# EAGLE board 04B-352-A1-01 (EAGLE 9.6.2)
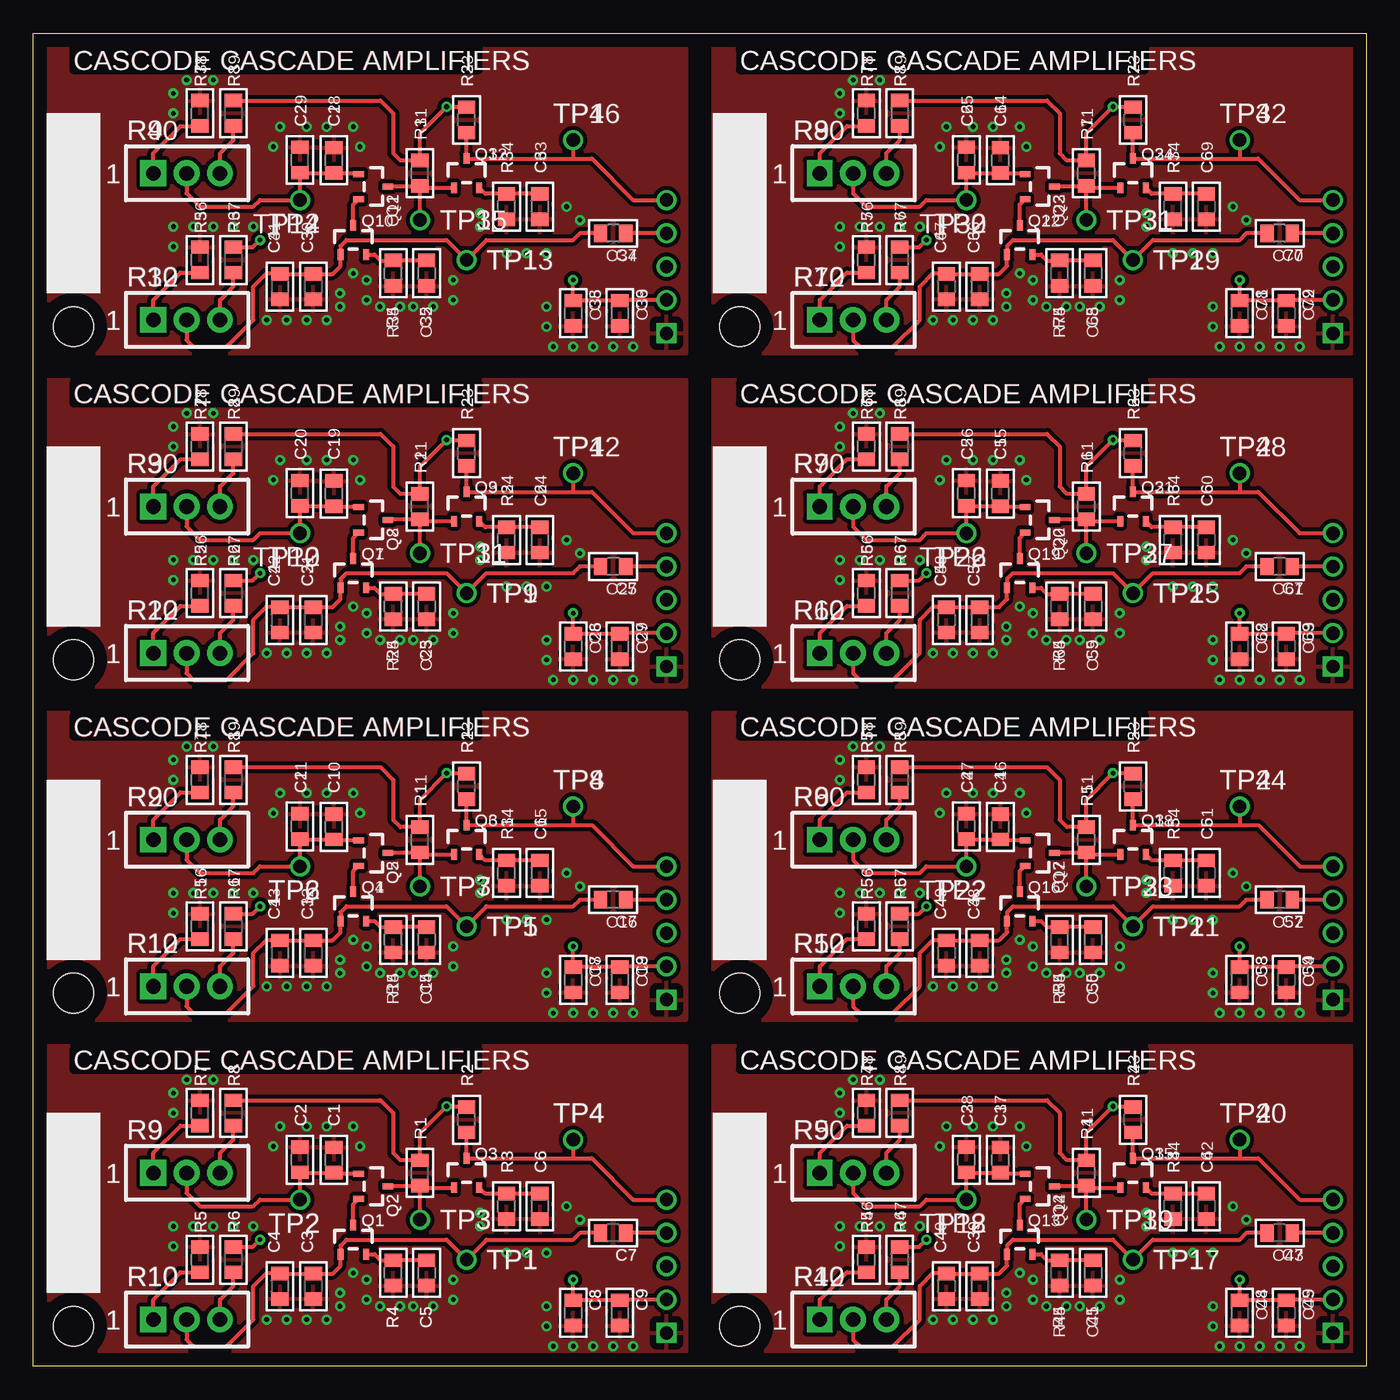
[diagram p0: board, top side]
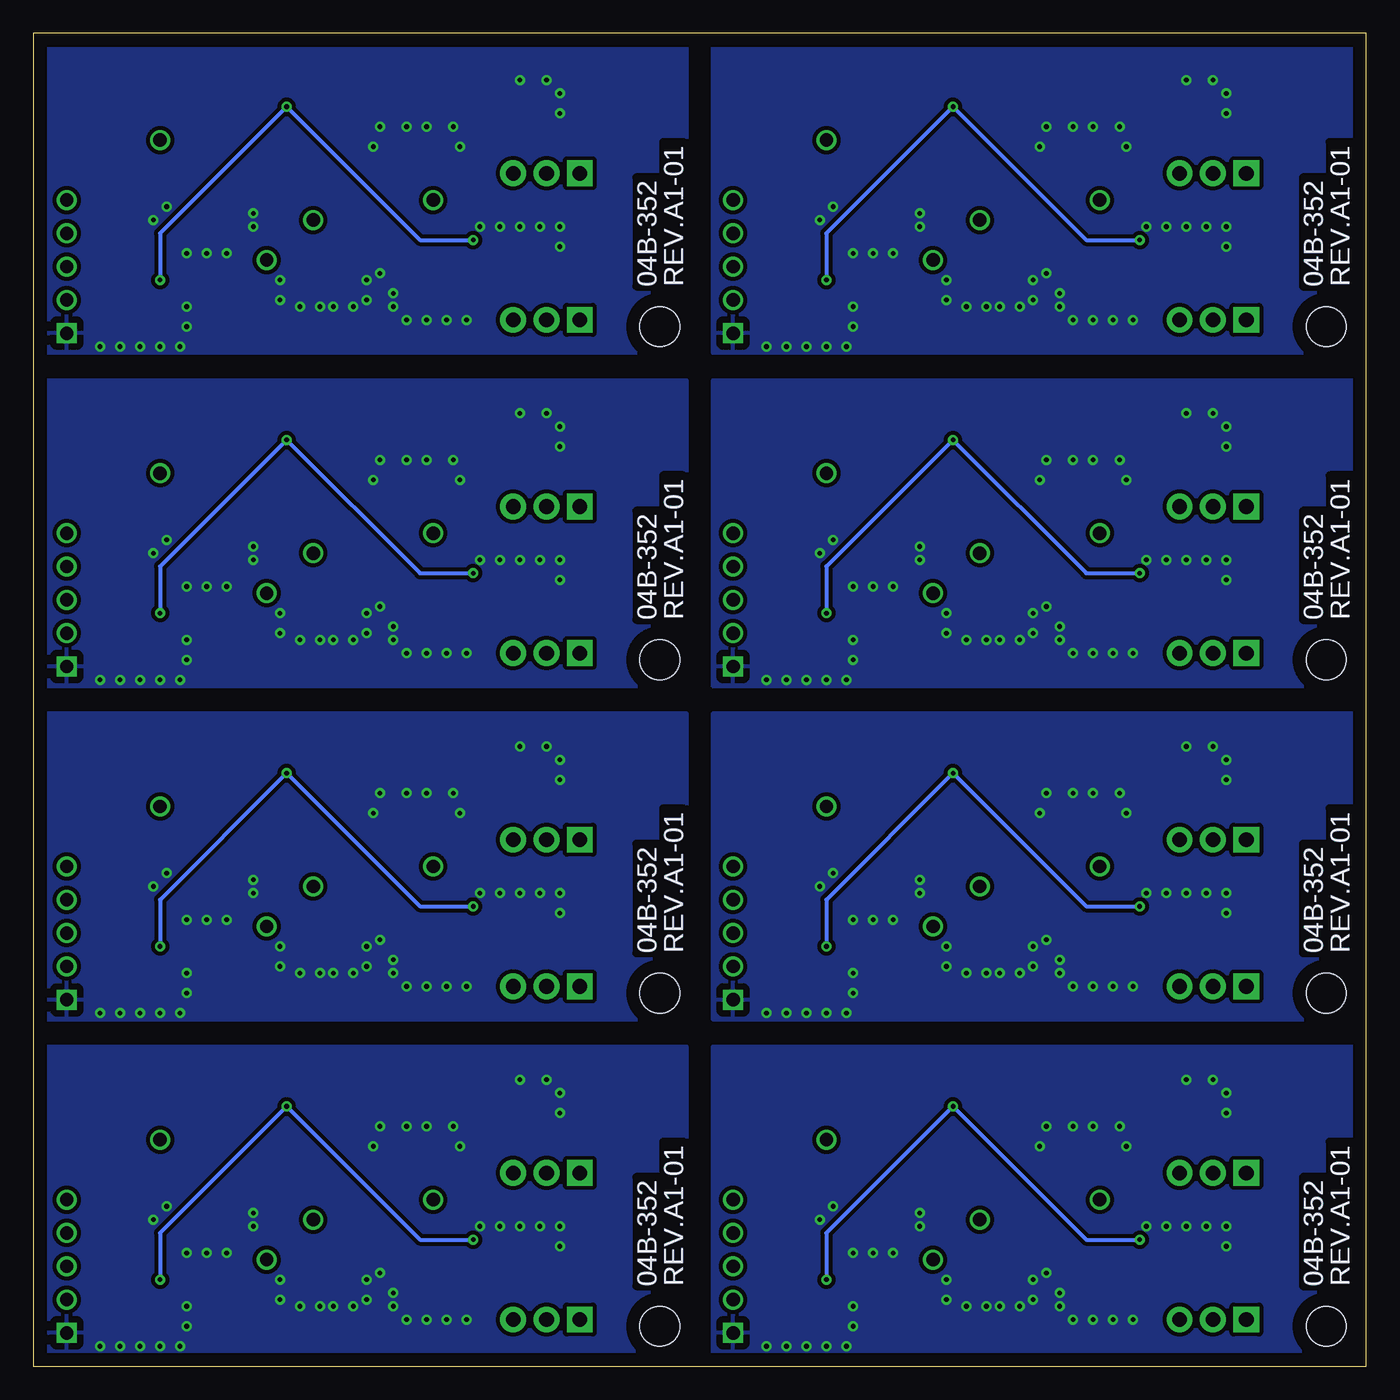
[diagram p1: board, bottom side, seen from below]

Size 100 x 100 mm. Coordinates in mm from the lower left corner, seen from the top.
Outline: 0,0 0,100 100,100 100,0 0,0
Copper layers (1+2*15+16): Top 0.035mm / dielectric 0.15mm / Route2 0.035mm / dielectric 0.15mm / Route15 0.035mm / dielectric 0.2mm / Bottom 0.035mm
Design rules "minipcb-SMD": minimum track width 0.25mm, minimum drill 0.5mm, track to track 0.3mm, track to pad 0.3mm, pad to pad 0.15mm, via to via 0.3mm, smd to smd 0.15mm, copper to edge 1mm, drill to drill 1mm, minimum pad ring 0.2mm, minimum via ring 0.2mm, stop-mask expansion 0.1mm, vias tented up to drill 0.55mm, thermal gap 0.5mm

## Footprints (pad centres in the part's own frame; a part is rotated, then mirrored left to right if it is on the bottom)
C0805 = smd 1 x 1.3: 1 -0.95,0; 2 0.95,0
PINS_1X5 = drill 1 square: 1 0,0 | drill 1: 2 2.5,0; 3 5,0; 4 7.5,0; 5 10,0
MINIPCB_0P_25X50 = hole 3: 3,3
SOT23 = smd 0.45 x 0.8: 1 -0.95,-1.1; 2 0.95,-1.1; 3 0,1.1
R0805 = smd 1 x 1.3: 1 -0.95,0; 2 0.95,0
TRIM_0100 = drill 1.1 pad 1.93 square: 1 0,0 | drill 1.1 pad 1.93: 2 2.5,0; 3 5,0
PINS_1_TESTPOINT_KE5000_NOTEXT = drill 1: 1 0,0

## Placement (x,y rotation side)
C1  [C0805]  22.56,15.47 90 top
C2  [C0805]  20,15.5 90 top
C3  [C0805]  21,6 270 top
C4  [C0805]  18.5,6 270 top
C5  [C0805]  29.5,7 270 top
C6  [C0805]  38,12 270 top
C7  [C0805]  43.5,10 180 top
C8  [C0805]  40.5,4 270 top
C9  [C0805]  44,4 270 top
C10  [C0805]  22.56,40.47 90 top
C11  [C0805]  20,40.5 90 top
C12  [C0805]  21,31 270 top
C13  [C0805]  18.5,31 270 top
C14  [C0805]  29.5,32 270 top
C15  [C0805]  38,37 270 top
C16  [C0805]  43.5,35 180 top
C17  [C0805]  40.5,29 270 top
C18  [C0805]  44,29 270 top
C19  [C0805]  22.56,65.47 90 top
C20  [C0805]  20,65.5 90 top
C21  [C0805]  21,56 270 top
C22  [C0805]  18.5,56 270 top
C23  [C0805]  29.5,57 270 top
C24  [C0805]  38,62 270 top
C25  [C0805]  43.5,60 180 top
C26  [C0805]  40.5,54 270 top
C27  [C0805]  44,54 270 top
C28  [C0805]  22.56,90.47 90 top
C29  [C0805]  20,90.5 90 top
C30  [C0805]  21,81 270 top
C31  [C0805]  18.5,81 270 top
C32  [C0805]  29.5,82 270 top
C33  [C0805]  38,87 270 top
C34  [C0805]  43.5,85 180 top
C35  [C0805]  40.5,79 270 top
C36  [C0805]  44,79 270 top
C37  [C0805]  72.56,15.47 90 top
C38  [C0805]  70,15.5 90 top
C39  [C0805]  71,6 270 top
C40  [C0805]  68.5,6 270 top
C41  [C0805]  79.5,7 270 top
C42  [C0805]  88,12 270 top
C43  [C0805]  93.5,10 180 top
C44  [C0805]  90.5,4 270 top
C45  [C0805]  94,4 270 top
C46  [C0805]  72.56,40.47 90 top
C47  [C0805]  70,40.5 90 top
C48  [C0805]  71,31 270 top
C49  [C0805]  68.5,31 270 top
C50  [C0805]  79.5,32 270 top
C51  [C0805]  88,37 270 top
C52  [C0805]  93.5,35 180 top
C53  [C0805]  90.5,29 270 top
C54  [C0805]  94,29 270 top
C55  [C0805]  72.56,65.47 90 top
C56  [C0805]  70,65.5 90 top
C57  [C0805]  71,56 270 top
C58  [C0805]  68.5,56 270 top
C59  [C0805]  79.5,57 270 top
C60  [C0805]  88,62 270 top
C61  [C0805]  93.5,60 180 top
C62  [C0805]  90.5,54 270 top
C63  [C0805]  94,54 270 top
C64  [C0805]  72.56,90.47 90 top
C65  [C0805]  70,90.5 90 top
C66  [C0805]  71,81 270 top
C67  [C0805]  68.5,81 270 top
C68  [C0805]  79.5,82 270 top
C69  [C0805]  88,87 270 top
C70  [C0805]  93.5,85 180 top
C71  [C0805]  90.5,79 270 top
C72  [C0805]  94,79 270 top
E$1  [MINIPCB_PANEL_IMAGEFRAME]  -25,-30 0 top  (outside the outline)
P1  [PINS_1X5]  47.5,2.5 90 top
P2  [PINS_1X5]  47.5,27.5 90 top
P3  [PINS_1X5]  47.5,52.5 90 top
P4  [PINS_1X5]  47.5,77.5 90 top
P5  [PINS_1X5]  97.5,2.5 90 top
P6  [PINS_1X5]  97.5,27.5 90 top
P7  [PINS_1X5]  97.5,52.5 90 top
P8  [PINS_1X5]  97.5,77.5 90 top
PCB1  [MINIPCB_0P_25X50]  0,0 0 top
PCB2  [MINIPCB_0P_25X50]  0,25 0 top
PCB3  [MINIPCB_0P_25X50]  0,50 0 top
PCB4  [MINIPCB_0P_25X50]  0,75 0 top
PCB5  [MINIPCB_0P_25X50]  50,0 0 top
PCB6  [MINIPCB_0P_25X50]  50,25 0 top
PCB7  [MINIPCB_0P_25X50]  50,50 0 top
PCB8  [MINIPCB_0P_25X50]  50,75 0 top
Q1  [SOT23]  24,9.5 0 top
Q2  [SOT23]  25.5,13.5 270 top
Q3  [SOT23]  32.5,14.5 0 top
Q4  [SOT23]  24,34.5 0 top
Q5  [SOT23]  25.5,38.5 270 top
Q6  [SOT23]  32.5,39.5 0 top
Q7  [SOT23]  24,59.5 0 top
Q8  [SOT23]  25.5,63.5 270 top
Q9  [SOT23]  32.5,64.5 0 top
Q10  [SOT23]  24,84.5 0 top
Q11  [SOT23]  25.5,88.5 270 top
Q12  [SOT23]  32.5,89.5 0 top
Q13  [SOT23]  74,9.5 0 top
Q14  [SOT23]  75.5,13.5 270 top
Q15  [SOT23]  82.5,14.5 0 top
Q16  [SOT23]  74,34.5 0 top
Q17  [SOT23]  75.5,38.5 270 top
Q18  [SOT23]  82.5,39.5 0 top
Q19  [SOT23]  74,59.5 0 top
Q20  [SOT23]  75.5,63.5 270 top
Q21  [SOT23]  82.5,64.5 0 top
Q22  [SOT23]  74,84.5 0 top
Q23  [SOT23]  75.5,88.5 270 top
Q24  [SOT23]  82.5,89.5 0 top
R1  [R0805]  29,14.5 90 top
R2  [R0805]  32.5,18.5 90 top
R3  [R0805]  35.5,12 90 top
R4  [R0805]  27,7 90 top
R5  [R0805]  12.5,8 90 top
R6  [R0805]  15,8 270 top
R7  [R0805]  12.5,19 90 top
R8  [R0805]  15,19 270 top
R9  [TRIM_0100]  9,14.5 0 top
R10  [TRIM_0100]  9,3.5 0 top
R11  [R0805]  29,39.5 90 top
R12  [TRIM_0100]  9,28.5 0 top
R13  [R0805]  32.5,43.5 90 top
R14  [R0805]  35.5,37 90 top
R15  [R0805]  27,32 90 top
R16  [R0805]  12.5,33 90 top
R17  [R0805]  15,33 270 top
R18  [R0805]  12.5,44 90 top
R19  [R0805]  15,44 270 top
R20  [TRIM_0100]  9,39.5 0 top
R21  [R0805]  29,64.5 90 top
R22  [TRIM_0100]  9,53.5 0 top
R23  [R0805]  32.5,68.5 90 top
R24  [R0805]  35.5,62 90 top
R25  [R0805]  27,57 90 top
R26  [R0805]  12.5,58 90 top
R27  [R0805]  15,58 270 top
R28  [R0805]  12.5,69 90 top
R29  [R0805]  15,69 270 top
R30  [TRIM_0100]  9,64.5 0 top
R31  [R0805]  29,89.5 90 top
R32  [TRIM_0100]  9,78.5 0 top
R33  [R0805]  32.5,93.5 90 top
R34  [R0805]  35.5,87 90 top
R35  [R0805]  27,82 90 top
R36  [R0805]  12.5,83 90 top
R37  [R0805]  15,83 270 top
R38  [R0805]  12.5,94 90 top
R39  [R0805]  15,94 270 top
R40  [TRIM_0100]  9,89.5 0 top
R41  [R0805]  79,14.5 90 top
R42  [TRIM_0100]  59,3.5 0 top
R43  [R0805]  82.5,18.5 90 top
R44  [R0805]  85.5,12 90 top
R45  [R0805]  77,7 90 top
R46  [R0805]  62.5,8 90 top
R47  [R0805]  65,8 270 top
R48  [R0805]  62.5,19 90 top
R49  [R0805]  65,19 270 top
R50  [TRIM_0100]  59,14.5 0 top
R51  [R0805]  79,39.5 90 top
R52  [TRIM_0100]  59,28.5 0 top
R53  [R0805]  82.5,43.5 90 top
R54  [R0805]  85.5,37 90 top
R55  [R0805]  77,32 90 top
R56  [R0805]  62.5,33 90 top
R57  [R0805]  65,33 270 top
R58  [R0805]  62.5,44 90 top
R59  [R0805]  65,44 270 top
R60  [TRIM_0100]  59,39.5 0 top
R61  [R0805]  79,64.5 90 top
R62  [TRIM_0100]  59,53.5 0 top
R63  [R0805]  82.5,68.5 90 top
R64  [R0805]  85.5,62 90 top
R65  [R0805]  77,57 90 top
R66  [R0805]  62.5,58 90 top
R67  [R0805]  65,58 270 top
R68  [R0805]  62.5,69 90 top
R69  [R0805]  65,69 270 top
R70  [TRIM_0100]  59,64.5 0 top
R71  [R0805]  79,89.5 90 top
R72  [TRIM_0100]  59,78.5 0 top
R73  [R0805]  82.5,93.5 90 top
R74  [R0805]  85.5,87 90 top
R75  [R0805]  77,82 90 top
R76  [R0805]  62.5,83 90 top
R77  [R0805]  65,83 270 top
R78  [R0805]  62.5,94 90 top
R79  [R0805]  65,94 270 top
R80  [TRIM_0100]  59,89.5 0 top
TP1  [PINS_1_TESTPOINT_KE5000_NOTEXT]  32.5,8 0 top
TP2  [PINS_1_TESTPOINT_KE5000_NOTEXT]  20,12.5 180 top
TP3  [PINS_1_TESTPOINT_KE5000_NOTEXT]  29,11 0 top
TP4  [PINS_1_TESTPOINT_KE5000_NOTEXT]  40.5,17 0 top
TP5  [PINS_1_TESTPOINT_KE5000_NOTEXT]  32.5,33 0 top
TP6  [PINS_1_TESTPOINT_KE5000_NOTEXT]  20,37.5 180 top
TP7  [PINS_1_TESTPOINT_KE5000_NOTEXT]  29,36 0 top
TP8  [PINS_1_TESTPOINT_KE5000_NOTEXT]  40.5,42 0 top
TP9  [PINS_1_TESTPOINT_KE5000_NOTEXT]  32.5,58 0 top
TP10  [PINS_1_TESTPOINT_KE5000_NOTEXT]  20,62.5 180 top
TP11  [PINS_1_TESTPOINT_KE5000_NOTEXT]  29,61 0 top
TP12  [PINS_1_TESTPOINT_KE5000_NOTEXT]  40.5,67 0 top
TP13  [PINS_1_TESTPOINT_KE5000_NOTEXT]  32.5,83 0 top
TP14  [PINS_1_TESTPOINT_KE5000_NOTEXT]  20,87.5 180 top
TP15  [PINS_1_TESTPOINT_KE5000_NOTEXT]  29,86 0 top
TP16  [PINS_1_TESTPOINT_KE5000_NOTEXT]  40.5,92 0 top
TP17  [PINS_1_TESTPOINT_KE5000_NOTEXT]  82.5,8 0 top
TP18  [PINS_1_TESTPOINT_KE5000_NOTEXT]  70,12.5 180 top
TP19  [PINS_1_TESTPOINT_KE5000_NOTEXT]  79,11 0 top
TP20  [PINS_1_TESTPOINT_KE5000_NOTEXT]  90.5,17 0 top
TP21  [PINS_1_TESTPOINT_KE5000_NOTEXT]  82.5,33 0 top
TP22  [PINS_1_TESTPOINT_KE5000_NOTEXT]  70,37.5 180 top
TP23  [PINS_1_TESTPOINT_KE5000_NOTEXT]  79,36 0 top
TP24  [PINS_1_TESTPOINT_KE5000_NOTEXT]  90.5,42 0 top
TP25  [PINS_1_TESTPOINT_KE5000_NOTEXT]  82.5,58 0 top
TP26  [PINS_1_TESTPOINT_KE5000_NOTEXT]  70,62.5 180 top
TP27  [PINS_1_TESTPOINT_KE5000_NOTEXT]  79,61 0 top
TP28  [PINS_1_TESTPOINT_KE5000_NOTEXT]  90.5,67 0 top
TP29  [PINS_1_TESTPOINT_KE5000_NOTEXT]  82.5,83 0 top
TP30  [PINS_1_TESTPOINT_KE5000_NOTEXT]  70,87.5 180 top
TP31  [PINS_1_TESTPOINT_KE5000_NOTEXT]  79,86 0 top
TP32  [PINS_1_TESTPOINT_KE5000_NOTEXT]  90.5,92 0 top

## Library data of the parts
C1-C72 E$1 P1-P8 Q1-Q24 R1-R80 TP1-TP32 = minipcb
PCB1-PCB8 = minipcb; PART_NUMBER: 04B-352; REVISION: A1-01; TITLE: CASCODE CASCADE AMPLIFIERS

## Nets
GND: C1.2 C2.2 C3.2 C4.2 C5.2 C6.2 C8.2 C9.2 P1.1 R3.1 R4.1 R5.2 R7.2
GND1: C10.2 C11.2 C12.2 C13.2 C14.2 C15.2 C17.2 C18.2 P2.1 R14.1 R15.1 R16.2 R18.2
GND2: C19.2 C20.2 C21.2 C22.2 C23.2 C24.2 C26.2 C27.2 P3.1 R24.1 R25.1 R26.2 R28.2
GND3: C28.2 C29.2 C30.2 C31.2 C32.2 C33.2 C35.2 C36.2 P4.1 R34.1 R35.1 R36.2 R38.2
GND4: C37.2 C38.2 C39.2 C40.2 C41.2 C42.2 C44.2 C45.2 P5.1 R44.1 R45.1 R46.2 R48.2
GND5: C46.2 C47.2 C48.2 C49.2 C50.2 C51.2 C53.2 C54.2 P6.1 R54.1 R55.1 R56.2 R58.2
GND6: C55.2 C56.2 C57.2 C58.2 C59.2 C60.2 C62.2 C63.2 P7.1 R64.1 R65.1 R66.2 R68.2
GND7: C64.2 C65.2 C66.2 C67.2 C68.2 C69.2 C71.2 C72.2 P8.1 R74.1 R75.1 R76.2 R78.2
N$1: R6.2 R10.3
N$2: R5.1 R10.1
N$3: R7.1 R9.1
N$4: R8.2 R9.3
N$5: C1.1 C2.1 Q2.1 R9.2 TP2.1
N$6: C3.1 C4.1 C7.2 Q1.1 R10.2 TP1.1
N$7: C5.1 Q1.2 R4.2
N$8: C6.1 Q3.2 R3.2
N$9: Q1.3 Q2.2
N$10: Q2.3 Q3.1 R1.1 TP3.1
N$11: C7.1 P1.4
N$12: P1.5 Q3.3 R2.1 TP4.1
N$13: R12.3 R17.2
N$14: R12.1 R16.1
N$15: R18.1 R20.1
N$16: R19.2 R20.3
N$17: C10.1 C11.1 Q5.1 R20.2 TP6.1
N$18: C12.1 C13.1 C16.2 Q4.1 R12.2 TP5.1
N$19: C14.1 Q4.2 R15.2
N$20: Q4.3 Q5.2
N$21: Q5.3 Q6.1 R11.1 TP7.1
N$22: C15.1 Q6.2 R14.2
N$23: P2.5 Q6.3 R13.1 TP8.1
N$24: C16.1 P2.4
N$25: R22.3 R27.2
N$26: R22.1 R26.1
N$27: R28.1 R30.1
N$28: R29.2 R30.3
N$29: C19.1 C20.1 Q8.1 R30.2 TP10.1
N$30: C21.1 C22.1 C25.2 Q7.1 R22.2 TP9.1
N$31: C23.1 Q7.2 R25.2
N$32: Q7.3 Q8.2
N$33: Q8.3 Q9.1 R21.1 TP11.1
N$34: C24.1 Q9.2 R24.2
N$35: P3.5 Q9.3 R23.1 TP12.1
N$36: C25.1 P3.4
N$37: R32.3 R37.2
N$38: R32.1 R36.1
N$39: R38.1 R40.1
N$40: R39.2 R40.3
N$41: C28.1 C29.1 Q11.1 R40.2 TP14.1
N$42: C30.1 C31.1 C34.2 Q10.1 R32.2 TP13.1
N$43: C32.1 Q10.2 R35.2
N$44: Q10.3 Q11.2
N$45: Q11.3 Q12.1 R31.1 TP15.1
N$46: C33.1 Q12.2 R34.2
N$47: P4.5 Q12.3 R33.1 TP16.1
N$48: C34.1 P4.4
N$49: R42.3 R47.2
N$50: R42.1 R46.1
N$51: R48.1 R50.1
N$52: R49.2 R50.3
N$53: C37.1 C38.1 Q14.1 R50.2 TP18.1
N$54: C39.1 C40.1 C43.2 Q13.1 R42.2 TP17.1
N$55: C41.1 Q13.2 R45.2
N$56: Q13.3 Q14.2
N$57: Q14.3 Q15.1 R41.1 TP19.1
N$58: C42.1 Q15.2 R44.2
N$59: P5.5 Q15.3 R43.1 TP20.1
N$60: C43.1 P5.4
N$61: R52.3 R57.2
N$62: R52.1 R56.1
N$63: R58.1 R60.1
N$64: R59.2 R60.3
N$65: C46.1 C47.1 Q17.1 R60.2 TP22.1
N$66: C48.1 C49.1 C52.2 Q16.1 R52.2 TP21.1
N$67: C50.1 Q16.2 R55.2
N$68: Q16.3 Q17.2
N$69: Q17.3 Q18.1 R51.1 TP23.1
N$70: C51.1 Q18.2 R54.2
N$71: P6.5 Q18.3 R53.1 TP24.1
N$72: C52.1 P6.4
N$73: R62.3 R67.2
N$74: R62.1 R66.1
N$75: R68.1 R70.1
N$76: R69.2 R70.3
N$77: C55.1 C56.1 Q20.1 R70.2 TP26.1
N$78: C57.1 C58.1 C61.2 Q19.1 R62.2 TP25.1
N$79: C59.1 Q19.2 R65.2
N$80: Q19.3 Q20.2
N$81: Q20.3 Q21.1 R61.1 TP27.1
N$82: C60.1 Q21.2 R64.2
N$83: P7.5 Q21.3 R63.1 TP28.1
N$84: C61.1 P7.4
N$85: R72.3 R77.2
N$86: R72.1 R76.1
N$87: R78.1 R80.1
N$88: R79.2 R80.3
N$89: C64.1 C65.1 Q23.1 R80.2 TP30.1
N$90: C66.1 C67.1 C70.2 Q22.1 R72.2 TP29.1
N$91: C68.1 Q22.2 R75.2
N$92: Q22.3 Q23.2
N$93: Q23.3 Q24.1 R71.1 TP31.1
N$94: C69.1 Q24.2 R74.2
N$95: P8.5 Q24.3 R73.1 TP32.1
N$96: C70.1 P8.4
V+: C8.1 C9.1 P1.2 R1.2 R2.2 R6.1 R8.1
V+1: C17.1 C18.1 P2.2 R11.2 R13.2 R17.1 R19.1
V+2: C26.1 C27.1 P3.2 R21.2 R23.2 R27.1 R29.1
V+3: C35.1 C36.1 P4.2 R31.2 R33.2 R37.1 R39.1
V+4: C44.1 C45.1 P5.2 R41.2 R43.2 R47.1 R49.1
V+5: C53.1 C54.1 P6.2 R51.2 R53.2 R57.1 R59.1
V+6: C62.1 C63.1 P7.2 R61.2 R63.2 R67.1 R69.1
V+7: C71.1 C72.1 P8.2 R71.2 R73.2 R77.1 R79.1

## Tracks (layer width: path | path; a pad name or v marks a point on that pad's centre or on a via)
GND  (via drill 0.35)
  other vias: 17.5,3.5 19,3.5 20.5,3.5 22,3.5 26,4.5 27.5,4.5 28.5,4.5 30,4.5 40,12 41,11 33.5,10.5 33.5,11.5 35.5,8.5 37,8.5 38.5,8.5 18,16.5 18.5,18 20.5,18 22,18 24,18 24.5,16.5 13.5,21.5 11.5,21.5 10.5,20.5 10.5,19 23,5.5 23,4.5 10.5,9 24,7 25,6.5 25,5 31.5,6.5 31.5,5 38.5,4.5 45,1.5 43.5,1.5 42,1.5 40.5,1.5 39,1.5 38.5,3 10.5,10.5 12,10.5 13.5,10.5 15,10.5 16.5,10.5
  pour Top: 1,1 49,1 49,24 1,24
  pour Bottom: 1,1 49,1 49,24 1,24
GND1  (via drill 0.35)
  other vias: 17.5,28.5 19,28.5 20.5,28.5 22,28.5 26,29.5 27.5,29.5 28.5,29.5 30,29.5 40,37 41,36 33.5,35.5 33.5,36.5 35.5,33.5 37,33.5 38.5,33.5 18,41.5 18.5,43 20.5,43 22,43 24,43 24.5,41.5 13.5,46.5 11.5,46.5 10.5,45.5 10.5,44 23,30.5 23,29.5 10.5,34 24,32 25,31.5 25,30 31.5,31.5 31.5,30 38.5,29.5 45,26.5 43.5,26.5 42,26.5 40.5,26.5 39,26.5 38.5,28 10.5,35.5 12,35.5 13.5,35.5 15,35.5 16.5,35.5
  pour Top: 1,26 49,26 49,49 1,49
  pour Bottom: 1,26 49,26 49,49 1,49
GND2  (via drill 0.35)
  other vias: 17.5,53.5 19,53.5 20.5,53.5 22,53.5 26,54.5 27.5,54.5 28.5,54.5 30,54.5 40,62 41,61 33.5,60.5 33.5,61.5 35.5,58.5 37,58.5 38.5,58.5 18,66.5 18.5,68 20.5,68 22,68 24,68 24.5,66.5 13.5,71.5 11.5,71.5 10.5,70.5 10.5,69 23,55.5 23,54.5 10.5,59 24,57 25,56.5 25,55 31.5,56.5 31.5,55 38.5,54.5 45,51.5 43.5,51.5 42,51.5 40.5,51.5 39,51.5 38.5,53 10.5,60.5 12,60.5 13.5,60.5 15,60.5 16.5,60.5
  pour Top: 1,51 49,51 49,74 1,74
  pour Bottom: 1,51 49,51 49,74 1,74
GND3  (via drill 0.35)
  other vias: 17.5,78.5 19,78.5 20.5,78.5 22,78.5 26,79.5 27.5,79.5 28.5,79.5 30,79.5 40,87 41,86 33.5,85.5 33.5,86.5 35.5,83.5 37,83.5 38.5,83.5 18,91.5 18.5,93 20.5,93 22,93 24,93 24.5,91.5 13.5,96.5 11.5,96.5 10.5,95.5 10.5,94 23,80.5 23,79.5 10.5,84 24,82 25,81.5 25,80 31.5,81.5 31.5,80 38.5,79.5 45,76.5 43.5,76.5 42,76.5 40.5,76.5 39,76.5 38.5,78 10.5,85.5 12,85.5 13.5,85.5 15,85.5 16.5,85.5
  pour Top: 1,76 49,76 49,99 1,99
  pour Bottom: 1,76 49,76 49,99 1,99
GND4  (via drill 0.35)
  other vias: 67.5,3.5 69,3.5 70.5,3.5 72,3.5 76,4.5 77.5,4.5 78.5,4.5 80,4.5 90,12 91,11 83.5,10.5 83.5,11.5 85.5,8.5 87,8.5 88.5,8.5 68,16.5 68.5,18 70.5,18 72,18 74,18 74.5,16.5 63.5,21.5 61.5,21.5 60.5,20.5 60.5,19 73,5.5 73,4.5 60.5,9 74,7 75,6.5 75,5 81.5,6.5 81.5,5 88.5,4.5 95,1.5 93.5,1.5 92,1.5 90.5,1.5 89,1.5 88.5,3 60.5,10.5 62,10.5 63.5,10.5 65,10.5 66.5,10.5
  pour Top: 51,1 99,1 99,24 51,24
  pour Bottom: 51,1 99,1 99,24 51,24
GND5  (via drill 0.35)
  other vias: 67.5,28.5 69,28.5 70.5,28.5 72,28.5 76,29.5 77.5,29.5 78.5,29.5 80,29.5 90,37 91,36 83.5,35.5 83.5,36.5 85.5,33.5 87,33.5 88.5,33.5 68,41.5 68.5,43 70.5,43 72,43 74,43 74.5,41.5 63.5,46.5 61.5,46.5 60.5,45.5 60.5,44 73,30.5 73,29.5 60.5,34 74,32 75,31.5 75,30 81.5,31.5 81.5,30 88.5,29.5 95,26.5 93.5,26.5 92,26.5 90.5,26.5 89,26.5 88.5,28 60.5,35.5 62,35.5 63.5,35.5 65,35.5 66.5,35.5
  pour Top: 51,26 99,26 99,49 51,49
  pour Bottom: 51,26 99,26 99,49 51,49
GND6  (via drill 0.35)
  other vias: 67.5,53.5 69,53.5 70.5,53.5 72,53.5 76,54.5 77.5,54.5 78.5,54.5 80,54.5 90,62 91,61 83.5,60.5 83.5,61.5 85.5,58.5 87,58.5 88.5,58.5 68,66.5 68.5,68 70.5,68 72,68 74,68 74.5,66.5 63.5,71.5 61.5,71.5 60.5,70.5 60.5,69 73,55.5 73,54.5 60.5,59 74,57 75,56.5 75,55 81.5,56.5 81.5,55 88.5,54.5 95,51.5 93.5,51.5 92,51.5 90.5,51.5 89,51.5 88.5,53 60.5,60.5 62,60.5 63.5,60.5 65,60.5 66.5,60.5
  pour Top: 51,51 99,51 99,74 51,74
  pour Bottom: 51,51 99,51 99,74 51,74
GND7  (via drill 0.35)
  other vias: 67.5,78.5 69,78.5 70.5,78.5 72,78.5 76,79.5 77.5,79.5 78.5,79.5 80,79.5 90,87 91,86 83.5,85.5 83.5,86.5 85.5,83.5 87,83.5 88.5,83.5 68,91.5 68.5,93 70.5,93 72,93 74,93 74.5,91.5 63.5,96.5 61.5,96.5 60.5,95.5 60.5,94 73,80.5 73,79.5 60.5,84 74,82 75,81.5 75,80 81.5,81.5 81.5,80 88.5,79.5 95,76.5 93.5,76.5 92,76.5 90.5,76.5 89,76.5 88.5,78 60.5,85.5 62,85.5 63.5,85.5 65,85.5 66.5,85.5
  pour Top: 51,76 99,76 99,99 51,99
  pour Bottom: 51,76 99,76 99,99 51,99
N$1
  Top 0.3: R10.3 14,5 15,6 R6.2
N$2
  Top 0.3: R10.1 9,5 11.05,7.05 R5.1
N$3
  Top 0.3: R9.1 9,16 11.05,18.05 R7.1
N$4
  Top 0.3: R9.3 14,16 15,17 R8.2
N$5
  Top 0.3: R9.2 11.5,13 12.5,12 16.5,12 17,12.5 TP2.1 C2.1 20.03,14.52 C1.1 22.63,14.45 Q2.1
N$6
  Top 0.3: R10.2 11.5,2 12,1.5 14.5,1.5 16.5,3.5 16.5,6 17.5,7 18.45,7 C4.1 C3.1 22.45,6.95 23.05,7.55 Q1.1 23.05,9.05 23.5,9.5 31,9.5 TP1.1 34,9.5 40.5,9.5 41,10 C7.2
N$7
  Top 0.3: Q1.2 25.6,8.4 26.05,7.95 R4.2 C5.1
N$8
  Top 0.3: C6.1 R3.2 33.9,12.95 Q3.2
N$9
  Top 0.3: Q1.3 24,12.15 Q2.2
N$10
  Top 0.3: Q2.3 26.65,13.55 R1.1 | R1.1 29.15,13.4 Q3.1 | TP3.1 R1.1
N$11
  Top 0.3: P1.4 C7.1
N$12
  Top 0.3: R2.1 Q3.3 40.5,15.6 | 40.5,15.6 41.9,15.6 45,12.5 P1.5 | TP4.1 40.5,15.6
N$13
  Top 0.3: R12.3 14,30 15,31 R17.2
N$14
  Top 0.3: R12.1 9,30 11.05,32.05 R16.1
N$15
  Top 0.3: R20.1 9,41 11.05,43.05 R18.1
N$16
  Top 0.3: R20.3 14,41 15,42 R19.2
N$17
  Top 0.3: R20.2 11.5,38 12.5,37 16.5,37 17,37.5 TP6.1 C11.1 20.03,39.52 C10.1 22.63,39.45 Q5.1
N$18
  Top 0.3: R12.2 11.5,27 12,26.5 14.5,26.5 16.5,28.5 16.5,31 17.5,32 18.45,32 C13.1 C12.1 22.45,31.95 23.05,32.55 Q4.1 23.05,34.05 23.5,34.5 31,34.5 TP5.1 34,34.5 40.5,34.5 41,35 C16.2
N$19
  Top 0.3: Q4.2 25.6,33.4 26.05,32.95 R15.2 C14.1
N$20
  Top 0.3: Q4.3 24,37.15 Q5.2
N$21
  Top 0.3: Q5.3 26.65,38.55 R11.1 | R11.1 29.15,38.4 Q6.1 | TP7.1 R11.1
N$22
  Top 0.3: C15.1 R14.2 33.9,37.95 Q6.2
N$23
  Top 0.3: R13.1 Q6.3 40.5,40.6 | 40.5,40.6 41.9,40.6 45,37.5 P2.5 | TP8.1 40.5,40.6
N$24
  Top 0.3: P2.4 C16.1
N$25
  Top 0.3: R22.3 14,55 15,56 R27.2
N$26
  Top 0.3: R22.1 9,55 11.05,57.05 R26.1
N$27
  Top 0.3: R30.1 9,66 11.05,68.05 R28.1
N$28
  Top 0.3: R30.3 14,66 15,67 R29.2
N$29
  Top 0.3: R30.2 11.5,63 12.5,62 16.5,62 17,62.5 TP10.1 C20.1 20.03,64.52 C19.1 22.63,64.45 Q8.1
N$30
  Top 0.3: R22.2 11.5,52 12,51.5 14.5,51.5 16.5,53.5 16.5,56 17.5,57 18.45,57 C22.1 C21.1 22.45,56.95 23.05,57.55 Q7.1 23.05,59.05 23.5,59.5 31,59.5 TP9.1 34,59.5 40.5,59.5 41,60 C25.2
N$31
  Top 0.3: Q7.2 25.6,58.4 26.05,57.95 R25.2 C23.1
N$32
  Top 0.3: Q7.3 24,62.15 Q8.2
N$33
  Top 0.3: Q8.3 26.65,63.55 R21.1 | R21.1 29.15,63.4 Q9.1 | TP11.1 R21.1
N$34
  Top 0.3: C24.1 R24.2 33.9,62.95 Q9.2
N$35
  Top 0.3: R23.1 Q9.3 40.5,65.6 | 40.5,65.6 41.9,65.6 45,62.5 P3.5 | TP12.1 40.5,65.6
N$36
  Top 0.3: P3.4 C25.1
N$37
  Top 0.3: R32.3 14,80 15,81 R37.2
N$38
  Top 0.3: R32.1 9,80 11.05,82.05 R36.1
N$39
  Top 0.3: R40.1 9,91 11.05,93.05 R38.1
N$40
  Top 0.3: R40.3 14,91 15,92 R39.2
N$41
  Top 0.3: R40.2 11.5,88 12.5,87 16.5,87 17,87.5 TP14.1 C29.1 20.03,89.52 C28.1 22.63,89.45 Q11.1
N$42
  Top 0.3: R32.2 11.5,77 12,76.5 14.5,76.5 16.5,78.5 16.5,81 17.5,82 18.45,82 C31.1 C30.1 22.45,81.95 23.05,82.55 Q10.1 23.05,84.05 23.5,84.5 31,84.5 TP13.1 34,84.5 40.5,84.5 41,85 C34.2
N$43
  Top 0.3: Q10.2 25.6,83.4 26.05,82.95 R35.2 C32.1
N$44
  Top 0.3: Q10.3 24,87.15 Q11.2
N$45
  Top 0.3: Q11.3 26.65,88.55 R31.1 | R31.1 29.15,88.4 Q12.1 | TP15.1 R31.1
N$46
  Top 0.3: C33.1 R34.2 33.9,87.95 Q12.2
N$47
  Top 0.3: R33.1 Q12.3 40.5,90.6 | 40.5,90.6 41.9,90.6 45,87.5 P4.5 | TP16.1 40.5,90.6
N$48
  Top 0.3: P4.4 C34.1
N$49
  Top 0.3: R42.3 64,5 65,6 R47.2
N$50
  Top 0.3: R42.1 59,5 61.05,7.05 R46.1
N$51
  Top 0.3: R50.1 59,16 61.05,18.05 R48.1
N$52
  Top 0.3: R50.3 64,16 65,17 R49.2
N$53
  Top 0.3: R50.2 61.5,13 62.5,12 66.5,12 67,12.5 TP18.1 C38.1 70.03,14.52 C37.1 72.63,14.45 Q14.1
N$54
  Top 0.3: R42.2 61.5,2 62,1.5 64.5,1.5 66.5,3.5 66.5,6 67.5,7 68.45,7 C40.1 C39.1 72.45,6.95 73.05,7.55 Q13.1 73.05,9.05 73.5,9.5 81,9.5 TP17.1 84,9.5 90.5,9.5 91,10 C43.2
N$55
  Top 0.3: Q13.2 75.6,8.4 76.05,7.95 R45.2 C41.1
N$56
  Top 0.3: Q13.3 74,12.15 Q14.2
N$57
  Top 0.3: Q14.3 76.65,13.55 R41.1 | R41.1 79.15,13.4 Q15.1 | TP19.1 R41.1
N$58
  Top 0.3: C42.1 R44.2 83.9,12.95 Q15.2
N$59
  Top 0.3: R43.1 Q15.3 90.5,15.6 | 90.5,15.6 91.9,15.6 95,12.5 P5.5 | TP20.1 90.5,15.6
N$60
  Top 0.3: P5.4 C43.1
N$61
  Top 0.3: R52.3 64,30 65,31 R57.2
N$62
  Top 0.3: R52.1 59,30 61.05,32.05 R56.1
N$63
  Top 0.3: R60.1 59,41 61.05,43.05 R58.1
N$64
  Top 0.3: R60.3 64,41 65,42 R59.2
N$65
  Top 0.3: R60.2 61.5,38 62.5,37 66.5,37 67,37.5 TP22.1 C47.1 70.03,39.52 C46.1 72.63,39.45 Q17.1
N$66
  Top 0.3: R52.2 61.5,27 62,26.5 64.5,26.5 66.5,28.5 66.5,31 67.5,32 68.45,32 C49.1 C48.1 72.45,31.95 73.05,32.55 Q16.1 73.05,34.05 73.5,34.5 81,34.5 TP21.1 84,34.5 90.5,34.5 91,35 C52.2
N$67
  Top 0.3: Q16.2 75.6,33.4 76.05,32.95 R55.2 C50.1
N$68
  Top 0.3: Q16.3 74,37.15 Q17.2
N$69
  Top 0.3: Q17.3 76.65,38.55 R51.1 | R51.1 79.15,38.4 Q18.1 | TP23.1 R51.1
N$70
  Top 0.3: C51.1 R54.2 83.9,37.95 Q18.2
N$71
  Top 0.3: R53.1 Q18.3 90.5,40.6 | 90.5,40.6 91.9,40.6 95,37.5 P6.5 | TP24.1 90.5,40.6
N$72
  Top 0.3: P6.4 C52.1
N$73
  Top 0.3: R62.3 64,55 65,56 R67.2
N$74
  Top 0.3: R62.1 59,55 61.05,57.05 R66.1
N$75
  Top 0.3: R70.1 59,66 61.05,68.05 R68.1
N$76
  Top 0.3: R70.3 64,66 65,67 R69.2
N$77
  Top 0.3: R70.2 61.5,63 62.5,62 66.5,62 67,62.5 TP26.1 C56.1 70.03,64.52 C55.1 72.63,64.45 Q20.1
N$78
  Top 0.3: R62.2 61.5,52 62,51.5 64.5,51.5 66.5,53.5 66.5,56 67.5,57 68.45,57 C58.1 C57.1 72.45,56.95 73.05,57.55 Q19.1 73.05,59.05 73.5,59.5 81,59.5 TP25.1 84,59.5 90.5,59.5 91,60 C61.2
N$79
  Top 0.3: Q19.2 75.6,58.4 76.05,57.95 R65.2 C59.1
N$80
  Top 0.3: Q19.3 74,62.15 Q20.2
N$81
  Top 0.3: Q20.3 76.65,63.55 R61.1 | R61.1 79.15,63.4 Q21.1 | TP27.1 R61.1
N$82
  Top 0.3: C60.1 R64.2 83.9,62.95 Q21.2
N$83
  Top 0.3: R63.1 Q21.3 90.5,65.6 | 90.5,65.6 91.9,65.6 95,62.5 P7.5 | TP28.1 90.5,65.6
N$84
  Top 0.3: P7.4 C61.1
N$85
  Top 0.3: R72.3 64,80 65,81 R77.2
N$86
  Top 0.3: R72.1 59,80 61.05,82.05 R76.1
N$87
  Top 0.3: R80.1 59,91 61.05,93.05 R78.1
N$88
  Top 0.3: R80.3 64,91 65,92 R79.2
N$89
  Top 0.3: R80.2 61.5,88 62.5,87 66.5,87 67,87.5 TP30.1 C65.1 70.03,89.52 C64.1 72.63,89.45 Q23.1
N$90
  Top 0.3: R72.2 61.5,77 62,76.5 64.5,76.5 66.5,78.5 66.5,81 67.5,82 68.45,82 C67.1 C66.1 72.45,81.95 73.05,82.55 Q22.1 73.05,84.05 73.5,84.5 81,84.5 TP29.1 84,84.5 90.5,84.5 91,85 C70.2
N$91
  Top 0.3: Q22.2 75.6,83.4 76.05,82.95 R75.2 C68.1
N$92
  Top 0.3: Q22.3 74,87.15 Q23.2
N$93
  Top 0.3: Q23.3 76.65,88.55 R71.1 | R71.1 79.15,88.4 Q24.1 | TP31.1 R71.1
N$94
  Top 0.3: C69.1 R74.2 83.9,87.95 Q24.2
N$95
  Top 0.3: R73.1 Q24.3 90.5,90.6 | 90.5,90.6 91.9,90.6 95,87.5 P8.5 | TP32.1 90.5,90.6
N$96
  Top 0.3: P8.4 C70.1
V+  (via drill 0.35)
  Top 0.3: P1.2 44.05,5 C9.1 C8.1 v40.5,6.5 | R2.2 32.45,19.5 v31,19.5 29,17.5 R1.2 27.55,15.45 27,16 27,19 26.05,19.95 R8.1 | R6.1 16.45,8.95 v17,9.5
  Bottom 0.3: v40.5,6.5 40.5,10 v31,19.5 21,9.5 v17,9.5
V+1  (via drill 0.35)
  Top 0.3: P2.2 44.05,30 C18.1 C17.1 v40.5,31.5 | R13.2 32.45,44.5 v31,44.5 29,42.5 R11.2 27.55,40.45 27,41 27,44 26.05,44.95 R19.1 | R17.1 16.45,33.95 v17,34.5
  Bottom 0.3: v40.5,31.5 40.5,35 v31,44.5 21,34.5 v17,34.5
V+2  (via drill 0.35)
  Top 0.3: P3.2 44.05,55 C27.1 C26.1 v40.5,56.5 | R23.2 32.45,69.5 v31,69.5 29,67.5 R21.2 27.55,65.45 27,66 27,69 26.05,69.95 R29.1 | R27.1 16.45,58.95 v17,59.5
  Bottom 0.3: v40.5,56.5 40.5,60 v31,69.5 21,59.5 v17,59.5
V+3  (via drill 0.35)
  Top 0.3: P4.2 44.05,80 C36.1 C35.1 v40.5,81.5 | R33.2 32.45,94.5 v31,94.5 29,92.5 R31.2 27.55,90.45 27,91 27,94 26.05,94.95 R39.1 | R37.1 16.45,83.95 v17,84.5
  Bottom 0.3: v40.5,81.5 40.5,85 v31,94.5 21,84.5 v17,84.5
V+4  (via drill 0.35)
  Top 0.3: P5.2 94.05,5 C45.1 C44.1 v90.5,6.5 | R43.2 82.45,19.5 v81,19.5 79,17.5 R41.2 77.55,15.45 77,16 77,19 76.05,19.95 R49.1 | R47.1 66.45,8.95 v67,9.5
  Bottom 0.3: v90.5,6.5 90.5,10 v81,19.5 71,9.5 v67,9.5
V+5  (via drill 0.35)
  Top 0.3: P6.2 94.05,30 C54.1 C53.1 v90.5,31.5 | R53.2 82.45,44.5 v81,44.5 79,42.5 R51.2 77.55,40.45 77,41 77,44 76.05,44.95 R59.1 | R57.1 66.45,33.95 v67,34.5
  Bottom 0.3: v90.5,31.5 90.5,35 v81,44.5 71,34.5 v67,34.5
V+6  (via drill 0.35)
  Top 0.3: P7.2 94.05,55 C63.1 C62.1 v90.5,56.5 | R63.2 82.45,69.5 v81,69.5 79,67.5 R61.2 77.55,65.45 77,66 77,69 76.05,69.95 R69.1 | R67.1 66.45,58.95 v67,59.5
  Bottom 0.3: v90.5,56.5 90.5,60 v81,69.5 71,59.5 v67,59.5
V+7  (via drill 0.35)
  Top 0.3: P8.2 94.05,80 C72.1 C71.1 v90.5,81.5 | R73.2 82.45,94.5 v81,94.5 79,92.5 R71.2 77.55,90.45 77,91 77,94 76.05,94.95 R79.1 | R77.1 66.45,83.95 v67,84.5
  Bottom 0.3: v90.5,81.5 90.5,85 v81,94.5 71,84.5 v67,84.5

## Text on the board
_tNames: R7 | R8 | R2 | R7 | R8 | R2 | C2 | C1 | TP4 | C2 | C1 | TP4 | R9 | R1 | R9 | R1 | Q3 | Q3 | R3 | C6 | R3 | C6 | Q2 | Q2 | TP2 | TP2 | Q1 | Q1 | R5 | R6 | TP3 | R5 | R6 | TP3 | C4 | C3 | C7 | C4 | C3 | C7 | TP1 | TP1 | R10 | C8 | C9 | R10 | C8 | C9 | R4 | C5 | R4 | C5 | R7 | R8 | R2 | R7 | R8 | R2 | C2 | C1 | TP4 | C2 | C1 | TP4 | R9 | R1 | R9 | R1 | Q3 | Q3 | R3 | C6 | R3 | C6 | Q2 | Q2 | TP2 | TP2 | Q1 | Q1 | R5 | R6 | TP3 | R5 | R6 | TP3 | C4 | C3 | C7 | C4 | C3 | C7 | TP1 | TP1 | R10 | C8 | C9 | R10 | C8 | C9 | R4 | C5 | R4 | C5 | R7 | R8 | R2 | R7 | R8 | R2 | C2 | C1 | TP4 | C2 | C1 | TP4 | R9 | R1 | R9 | R1 | Q3 | Q3 | R3 | C6 | R3 | C6 | Q2 | Q2 | TP2 | TP2 | Q1 | Q1 | R5 | R6 | TP3 | R5 | R6 | TP3 | C4 | C3 | C7 | C4 | C3 | C7 | TP1 | TP1 | R10 | C8 | C9 | R10 | C8 | C9 | R4 | C5 | R4 | C5 | R7 | R8 | R2 | R7 | R8 | R2 | C2 | C1 | TP4 | C2 | C1 | TP4 | R9 | R1 | R9 | R1 | Q3 | Q3 | R3 | C6 | R3 | C6 | Q2 | Q2 | TP2 | TP2 | Q1 | Q1 | R5 | R6 | TP3 | R5 | R6 | TP3 | C4 | C3 | C7 | C4 | C3 | C7 | TP1 | TP1 | R10 | C8 | C9 | R10 | C8 | C9 | R4 | C5 | R4 | C5